# Altium PCB VESC6_3.PcbDoc
Units mm, origin at the board's own origin, x right, y up, seen from the top; angles counter-clockwise.
Board outline 80 x 50.09 mm, 2 copper layers (Top Layer, Bottom Layer); 104 components, 93 nets, 439 pads, 260 vias.
Unrouted connection lines stored in the file: 111.
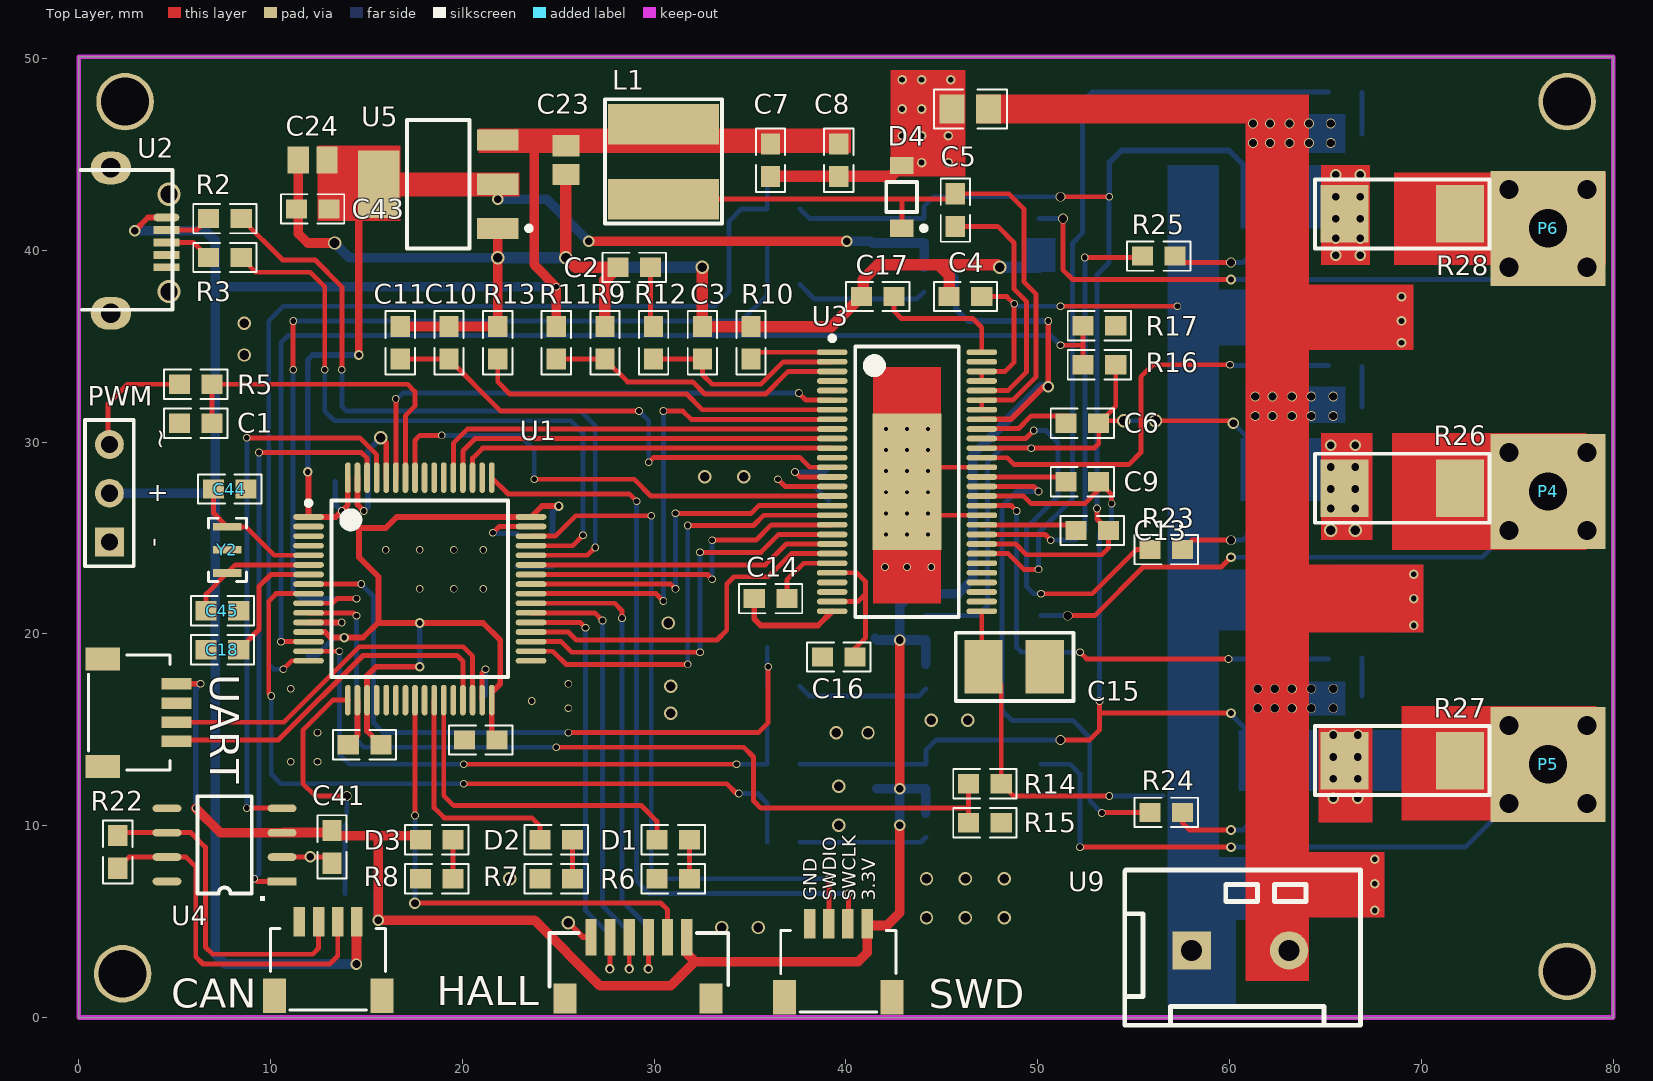
[diagram p0: Top Layer view]
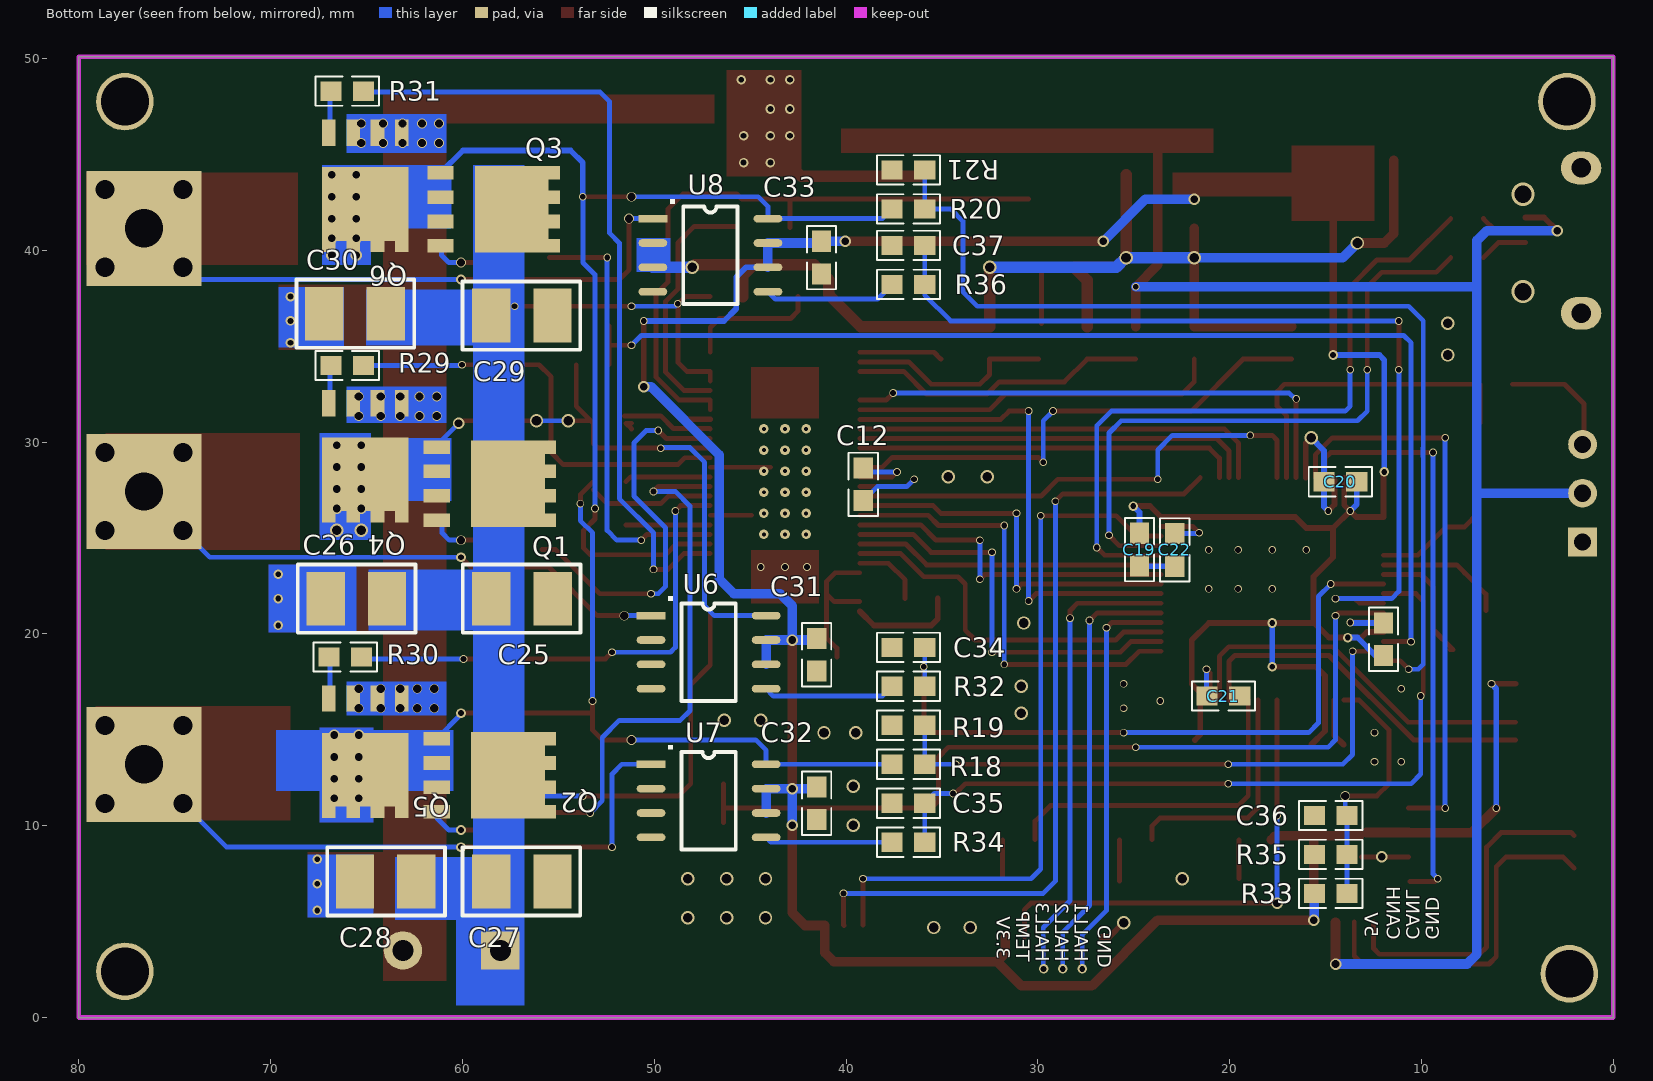
[diagram p1: Bottom Layer view, seen from below]

## Layer stack, top to bottom
Top Solder: solder mask 0.0102, Solder Resist, Dk 3.5
Top Layer: signal copper 0.0356
Dielectric1: dielectric 0.32, FR-4, Dk 4.8
Bottom Layer: signal copper 0.0356
Bottom Solder: solder mask 0.0102, Solder Resist, Dk 3.5

## Board outline
0,0 80,0 80,50.094 0,50.094 0,0

## Design rules (kind name [scope] priority, off if disabled: settings)
Clearance [All] p1: gap=0.2 ignorepadtopadclearanceinfootprint=FALSE except(0: Arc-Hole Track-Hole SMDPad-Hole THPad-Hole Via-Hole Fill-Hole Poly-Hole Region-Hole Text-Hole)
PlaneConnect [All] p1: planeconnectstyle=Direct reliefexpansion=0.508 reliefentries=4 reliefconductorwidth=0.254 reliefairgap=0.254
PolygonConnect [All] p1: connectstyle=Direct reliefconductorwidth=0.254 reliefentries=4 polygonreliefangle="90 Angle" airgapwidth=0.254
RoutingVias [All] p1: holewidth=0.711 width=1.27 viastyle="Through Hole" minholewidth=0.711 minwidth=1.27 maxholewidth=0.711 maxwidth=1.27
SilkToSolderMaskClearance SilkscreenOverComponentPads [IsPad] p1: minsilkscreentomaskgap=0.254 clearancetoexposedcopper=TRUE
SolderMaskExpansion [All] p1: expansion=0.102
Width [All] p1: maxlimit=0.8 minlimit=0.254 preferedwidth=0.3
28 further rules are at their usual default settings.

## Classes and differential pairs
component class TopLevel: C1 CAN D1 D2 D3 HALL PWM R2 R3 R5 R6 R7 R8 SWD U2 UART
component class POWER: C25 C26 C27 C28 C29 C30 C31 C32 C33 C34 C35 C36 C37 C38 C39 C40 P4 P5 P6 Q1 Q2 Q3 Q4 Q5 Q6 R23 R24 R25 R26 R27 R28 R29 R30 R31 R32 R33 R34 R35 R36 U6 U7 U8 U9
component class MCU: C18 C19 C20 C21 C22 C44 C45 U1 Y2
component class DRV8301: C2 C3 C4 C5 C6 C7 C8 C9 C10 C11 C12 C13 C14 C15 C16 C17 C23 C24 C43 D4 L1 R9 R10 R11 R12 R13 R14 R15 R16 R17 R18 R19 R20 R21 U3 U5
component class CAN: C41 R22 U4

## Components (designator, comment, footprint, x,y, rotation, side; value= is the part's Value field where it differs from the comment)
C1 "100nF" 0603-1 6.096,30.988 r0 top
C2 "6.8nF" 0603-1 28.956,39.116 r180 top
C3 "120pF" 0603-1 32.512,35.179 r90 top
C4 "4.7uF 100V" 0603-1 46.228,37.592 r180 top
C5 "100nf" 0603-1 45.7,42.1 r270 top
C6 "220nF" 0603-1 52.324,30.988 r180 top
C7 "2.2uF" 0603-1 36.068,44.704 r270 top
C8 "100uF" 0603-1 39.624,44.704 r270 top
C9 "220nF" 0603-1 52.324,27.94 r180 top
C10 "2.2uf" 0603-1 19.304,35.179 r270 top
C11 "2.2uf" 0603-1 16.764,35.179 r270 top
C12 "22nf" 0603-1 39.1,27.8 r90 bottom
C13 "220nF" 0603-1 52.832,25.4 r180 top
C14 "2.2uf" 0603-1 36.068,21.844 r0 top
C15 "4.7uF 100V" 1210 48.768,18.288 r180 top
C16 "2.2uf" 0603-1 39.624,18.796 r0 top
C17 "15nf" 0603-1 41.656,37.592 r180 top
C18 "100nf" 0603-1 7.493,19.177 r0 top
C19 "2.2u" 0603-1 24.7,24.4 r90 bottom
C20 "2.2u" 0603-1 14.224,27.94 r180 bottom
C21 "2.2u" 0603-1 20.32,16.764 r0 bottom
C22 "2.2u" 0603-1 22.86,24.384 r90 bottom
C23 "10uF" CAP805L 25.4,44.704 r90 top
C24 "10uF" CAP805L 12.192,44.704 r0 top
C25 "4.7uF 100V" 1210 56.896,21.844 r180 bottom
C26 "4.7uF 100V" 1210 65.532,21.844 r0 bottom
C27 "4.7uF 100V" 1210 56.9,7.1 r180 bottom
C28 "4.7uF 100V" 1210 64,7.1 r0 bottom
C29 "4.7uF 100V" 1210 56.9,36.6 r180 bottom
C30 "4.7uF 100V" 1210 65.6,36.7 r0 bottom
C31 "100nf" 0603-1 41.529,18.923 r270 bottom
C32 "100nf" 0603-1 41.529,11.176 r270 bottom
C33 "100nf" 0603-1 41.275,39.624 r270 bottom
C34 "4.7nF" 0603-1 36.742,19.304 r180 bottom
C35 "4.7nF" 0603-1 36.742,11.176 r180 bottom
C36 "1uF" 0603-1 14.732,10.541 r180 bottom
C37 "4.7nF" 0603-1 36.742,40.259 r180 bottom
C41 "100nf" 0603-1 13.2,8.9 r270 top
C43 "100nf" 0603-1 12.192,42.164 r0 top
C44 "100nf" 0603-1 7.874,27.559 r180 top
C45 "100nf" 0603-1 7.493,21.209 r180 top
CAN "header" "JST SH 4 Pin Side Entry" 13,0.4 r0 top (schematic designator JP1)
D1 "BLUE" 0603-1 30.988,9.271 r0 top
D2 "RED" 0603-1 24.892,9.271 r0 top
D3 "GREEN" 0603-1 18.669,9.271 r0 top
D4 "Diode 10TQ035" 0603二极管 42.9,42.789 r270 top
HALL "header" SMD-6 31.7,4.2 r180 top (schematic designator JP2)
L1 "22uH" 2.2uH电感 30.48,42.672 r90 top
P4 "PadS" MOTOR_PAD 76.6,27.432 r0 top
P5 "PadS" MOTOR_PAD 76.6,13.2 r0 top
P6 "PadS" MOTOR_PAD 76.6,41.148 r0 top
PWM "Header 3" HDR1X3 1.6,24.8 r90 top (schematic designator P2)
Q1 "CSD18540Q5B" SON5X6 55.7,30.1 r0 bottom
Q2 "CSD18540Q5B" SON5X6 55.7,14.9 r0 bottom
Q3 "CSD18540Q5B" SON5X6 55.5,44.4 r0 bottom
Q4 "CSD18540Q5B" SON5X6 62.8,26.4 r90 bottom
Q5 "CSD18540Q5B" SON5X6 62.8,11 r90 bottom
Q6 "CSD18540Q5B" SON5X6 62.8,40.5 r90 bottom
R2 "22R" 0603-1 7.62,41.656 r0 top
R3 "22R" 0603-1 7.62,39.624 r0 top
R5 "100R" 0603-1 6.096,33.02 r0 top
R6 "1K" 0603-1 30.988,7.239 r180 top
R7 "220R" 0603-1 24.892,7.239 r180 top
R8 "220R" 0603-1 18.669,7.239 r180 top
R9 "3.3K" 0603-1 27.432,35.179 r90 top
R10 "220K" 0603-1 35.052,35.179 r90 top
R11 "18K" 0603-1 24.892,35.179 r270 top
R12 "15K" 0603-1 29.972,35.179 r90 top
R13 "10K" 0603-1 21.844,35.179 r90 top
R14 "39K" 0603-1 47.244,12.192 r180 top
R15 "2.2K" 0603-1 47.244,10.16 r180 top
R16 "39K" 0603-1 53.213,34.036 r180 top
R17 "2.2K" 0603-1 53.213,36.068 r180 top
R18 "39K" 0603-1 36.742,13.208 r180 bottom
R19 "2.2K" 0603-1 36.742,15.24 r180 bottom
R20 "39K" 0603-1 36.742,42.164 r180 bottom
R21 "2.2K" 0603-1 36.742,44.196 r180 bottom
R22 "220R" 0603-1 2.032,8.636 r270 top
R23 "4.7R" 0603-1 56.7,24.4 r0 top
R24 "4.7R" 0603-1 56.7,10.7 r0 top
R25 "4.7R" 0603-1 56.3,39.7 r0 top
R26 "0.0005R" 采样电阻0.0005R 69,27.6 r180 top
R27 "0.0005R" 采样电阻0.0005R 69,13.4 r180 top
R28 "0.0005R" 采样电阻0.0005R 69,41.9 r180 top
R29 "4.7R" 0603-1 66,34 r0 bottom
R30 "4.7R" 0603-1 66.1,18.8 r0 bottom
R31 "4.7R" 0603-1 66,48.3 r0 bottom
R32 "100R" 0603-1 36.742,17.272 r0 bottom
R33 "10k" 0603-1 14.732,6.477 r0 bottom
R34 "100R" 0603-1 36.742,9.144 r0 bottom
R35 "10k" 0603-1 14.732,8.509 r180 bottom
R36 "100R" 0603-1 36.742,38.227 r0 bottom
SWD "Header 4" "JST SH 4 Pin Side Entry" 39.6,0.3 r0 top (schematic designator P3)
U1 "STM32F405RGT6" LQFP64 17.78,22.352 r0 top
U2 "USB_Mini_B" Micro_USB 4.572,39.116 r270 top
U3 "DRV8301" DRV8301 43.18,27.94 r0 top
U4 "TJA1050" SOP8-TJA1050 10.6,7.1 r180 top
U5 "AMS1117" AMS1117-SOT-223 21.844,41.148 r90 top
U6 "AD8418" SOP8-TJA1050 50.165,20.955 r180 bottom
U7 "AD8418" SOP8-TJA1050 50.165,13.208 r180 bottom
U8 "AD8418" SOP8-TJA1050 50.069,41.656 r180 bottom
U9 "Header 3" "KF 5.08-3" 63.1,3.5 r0 top
UART "Header 4" "JST SH 4 Pin Side Entry" 0.5,15.9 r270 top (schematic designator P1)
Y2 "贴片晶振 丝印80.b 3125 3脚" "CSTCE 12M" 7.747,24.384 r90 top

## Footprints (in the part's own frame and the unit in brackets; to place one, negate y for a bottom-side part, rotate by r counter-clockwise, add the part's x,y. Pads: shape width x height; smd on the part's side, far side on the other; paste and mask are expansions set on the pad)
2.2uH电感 [mm]
  rect 2.1x5.8 smd: 1(0,0) 2(3.9,0)
  silkscreen extent -1.27,-3.05 5.21,3.05
0603-1 [mm] "贴片带丝印"
  rect 1.1x1 smd: 1(-0.85,0) 2(0.85,0)
  silkscreen extent -1.65,-0.76 1.65,0.76, body extent -1.14,-0.38 1.14,0.38, height 1
0603二极管 [mm]
  rect 0.91x1.22 smd: 1(1.635,0) 2(-1.635,0)
  silkscreen extent -0.78,-0.8 1.76,1.29
1210 [mm]
  rect 2x2.8 smd: 1(-1.6,0) 2(1.6,0)
  silkscreen extent -3.09,-1.78 3.05,1.78
AMS1117-SOT-223 [mm]
  rect 1.1x2.15 smd: 1(0,0) 2(2.3,0) 3(4.6,0)
  rect 3.5x2.15 smd: 2(2.3,6.2)
  silkscreen extent -1.05,-1.75 5.65,4.72
CAP805L [mm] "Chip Capacitor, Body 2.0x1.3mm, IPC High Density"
  rect 1.1x1.4 smd: 1(-0.75,0) 2(0.75,0)
  body extent -1,-0.62 1,0.63, height 0.78
"CSTCE 12M" [mm] "晶振 3.2*1.3"
  rect 0.4x1.5 smd: 1(-1.2,0) 2(1.2,0) 3(0,0)
  silkscreen extent -1.65,-0.99 1.65,0.99, body extent -1.55,-0.89 1.55,0.89, height 0.5
DRV8301 [mm] "TSSOP, 56-Leads, Body 14.00x6.10mm, Pitch 0.50mm, Thermal Pad 7.11x3.61mm, IPC Low Density"
  oval 1.6x0.3 smd: 1(-3.9,6.75) 2(-3.9,6.25) 3(-3.9,5.75) 4(-3.9,5.25) 5(-3.9,4.75) 6(-3.9,4.25) 7(-3.9,3.75) 8(-3.9,3.25) 9(-3.9,2.75) 10(-3.9,2.25) 11(-3.9,1.75) 12(-3.9,1.25) 13(-3.9,0.75) 14(-3.9,0.25) 15(-3.9,-0.25) 16(-3.9,-0.75) 17(-3.9,-1.25) 18(-3.9,-1.75) 19(-3.9,-2.25) 20(-3.9,-2.75) 21(-3.9,-3.25) 22(-3.9,-3.75) 23(-3.9,-4.25) 24(-3.9,-4.75) 25(-3.9,-5.25) 26(-3.9,-5.75) 27(-3.9,-6.25) 28(-3.9,-6.75) 29(3.9,-6.75) 30(3.9,-6.25) 31(3.9,-5.75) 32(3.9,-5.25) 33(3.9,-4.75) 34(3.9,-4.25) 35(3.9,-3.75) 36(3.9,-3.25) 37(3.9,-2.75) 38(3.9,-2.25) 39(3.9,-1.75) 40(3.9,-1.25) 41(3.9,-0.75) 42(3.9,-0.25) 43(3.9,0.25) 44(3.9,0.75) 45(3.9,1.25) 46(3.9,1.75) 47(3.9,2.25) 48(3.9,2.75) 49(3.9,3.25) 50(3.9,3.75) 51(3.9,4.25) 52(3.9,4.75) 53(3.9,5.25) 54(3.9,5.75) 55(3.9,6.25) 56(3.9,6.75)
  rect 3.61x7.11 smd: 57(0,0)
  silkscreen extent -4.02,-7.05 2.7,7.6, body extent -4.05,-7.05 4.05,7.05, height 1.2
HDR1X3 [mm] "Connector; Header; 3 Position"
  rect 1.5x1.5 hole 0.9: 1(0,0)
  round 1.5 hole 0.9: 2(2.54,0) 3(5.08,0)
  silkscreen extent -1.27,-1.27 6.35,1.27
"JST SH 4 Pin Side Entry" [mm] "SM04B-SRSS-TB"
  rect 1.2x1.8 smd: 0(-2.8,0.75) 0(2.8,0.75)
  rect 0.6x1.55 smd: 1(-1.5,4.6) 2(-0.5,4.6) 3(0.5,4.6) 4(1.5,4.6)
  silkscreen extent -3,0 3,4.25, body extent -3,0 3,4.95, height 2.92
"KF 5.08-3" [mm]
  rect 2x2 hole 1.1: 1(-5.08,0)
  round 2 hole 1.1: 2(0,0)
  silkscreen extent -8.57,-3.9 3.72,4.2, body extent -7.45,-4 2.07,4.1, height 10.15
LQFP64 [mm] "TSQFP, 64-Leads, Body 10.00x10.00mm, Pitch 0.50mm, IPC Low Density"
  oval 1.6x0.3 smd: 1(-5.8,3.75) 2(-5.8,3.25) 3(-5.8,2.75) 4(-5.8,2.25) 5(-5.8,1.75) 6(-5.8,1.25) 7(-5.8,0.75) 8(-5.8,0.25) 9(-5.8,-0.25) 10(-5.8,-0.75) 11(-5.8,-1.25) 12(-5.8,-1.75) 13(-5.8,-2.25) 14(-5.8,-2.75) 15(-5.8,-3.25) 16(-5.8,-3.75) 33(5.8,-3.75) 34(5.8,-3.25) 35(5.8,-2.75) 36(5.8,-2.25) 37(5.8,-1.75) 38(5.8,-1.25) 39(5.8,-0.75) 40(5.8,-0.25) 41(5.8,0.25) 42(5.8,0.75) 43(5.8,1.25) 44(5.8,1.75) 45(5.8,2.25) 46(5.8,2.75) 47(5.8,3.25) 48(5.8,3.75)
  oval 0.3x1.6 smd: 17(-3.75,-5.8) 18(-3.25,-5.8) 19(-2.75,-5.8) 20(-2.25,-5.8) 21(-1.75,-5.8) 22(-1.25,-5.8) 23(-0.75,-5.8) 24(-0.25,-5.8) 25(0.25,-5.8) 26(0.75,-5.8) 27(1.25,-5.8) 28(1.75,-5.8) 29(2.25,-5.8) 30(2.75,-5.8) 31(3.25,-5.8) 32(3.75,-5.8) 49(3.75,5.8) 50(3.25,5.8) 51(2.75,5.8) 52(2.25,5.8) 53(1.75,5.8) 54(1.25,5.8) 55(0.75,5.8) 56(0.25,5.8) 57(-0.25,5.8) 58(-0.75,5.8) 59(-1.25,5.8) 60(-1.75,5.8) 61(-2.25,5.8) 62(-2.75,5.8) 63(-3.25,5.8) 64(-3.75,5.8)
  silkscreen extent -5.92,-4.6 4.6,4.6, body extent -6,-6 6,6, height 1.6
Micro_USB [mil]
  oval 16x53 smd mask+1: 1(-102.36,0)
  rect 16x53 smd mask+1: 1(0,0) 2(-76.77,0) 3(-51.18,0) 4(-25.59,0)
  oval 67x83 hole 40 mask+1: 6(-204,-114) 7(94,-114)
  silkscreen extent -200,-175 87,12
MOTOR_PAD [mil]
  round 60 hole 39.37: 1(-80,-80) 1(-80,80) 1(80,-80) 1(80,80)
  rect 236.22x236.22 hole 78.74: 1(0,0)
SMD-6 [mil]
  rect 23x75 smd mask+1: 1(0,0) 2(39.37,0) 3(78.74,0) 4(118.11,0) 5(157.48,0) 6(196.85,0)
  rect 47x62 smd mask+1: 7(250,126) 8(-50,126)
  silkscreen extent -85,-8 282,102
SON5X6 [mm]
  rect 1.372x0.71 smd: 1(5.636,0.355) 1(5.636,1.625) 1(5.636,2.895) 4(5.636,4.165)
  rect 0.59x0.71 smd: 8(-0.295,0.355) 8(-0.295,1.625) 8(-0.295,4.165) 8(-0.295,2.895)
  rect 3.85x4.52 smd: 8(1.925,2.26)
SOP8-TJA1050 [mm]
  rect 1.5x0.4 smd: 1(0,0)
  oval 1.5x0.4 smd: 2(0,-1.27) 3(0,-2.54) 4(0,-3.81) 5(6,-3.81) 6(6,-2.54) 7(6,-1.27) 8(6,0)
  silkscreen extent 0.89,-4.44 4.42,1.02
采样电阻0.0005R [mm]
  rect 2.5x3 smd: 1(-3,0) 2(3,0)
  silkscreen extent -4.55,-1.8 4.55,1.8

## Part data
C1 C2 C3 C4 C5 C6 C7 C8 C9 C10 C11 C12 C13 C14 C15 C16 C17 C18 C19 C20 C21 C22 C23 C24 C25 C26 C27 C28 C29 C30 C31 C32 C33 C34 C35 C36 C37 C41 C43 C44 C45: library part CAP, "Capacitor"
CAN: library part "HEADER 4"
D1 D2 D3: library part LED, "LED 发光二极管"
D4: "Schottky Rectifier"
HALL: library part "HEADER 6"
L1: library part L_Inductance
PWM U9: "Header, 3-Pin"
R2 R3 R5 R6 R7 R8 R9 R10 R11 R12 R13 R14 R15 R16 R17 R18 R19 R20 R21 R22 R23 R24 R25 R26 R27 R28 R29 R30 R31 R32 R33 R34 R35 R36: library part RES, "Resistor"
SWD UART: "Header, 4-Pin"
U5: "3.3V电压转换器AMS1117"
Y2: library part CRYSTAL_1, "Crystal"

## Free pads (board coordinates)
  round 3 hole 2.5: 0(2.286,2.286) 1(77.597,2.413) 2(77.597,47.752) 3(2.413,47.752)
  rect 1x1.1 smd far side: 1(11.98,20.579) 2(11.98,18.879)
  rect 1.1x1 smd: 1(14.048,14.224) 1(20.105,14.478) 2(15.748,14.224) 2(21.805,14.478)
  rect 1.3x1.5 smd: 1(45.532,47.371) 2(47.432,47.371)

## Via types
v1: diameter 0.4, hole 0.3, Top Layer to Bottom Layer, 98 vias
v2: diameter 0.6, hole 0.4, Top Layer to Bottom Layer, 39 vias
v3: diameter 0.508, hole 0.432, Top Layer to Bottom Layer, 37 vias
v4: diameter 0.5, hole 0.3, Top Layer to Bottom Layer, 33 vias
v5: diameter 0.7, hole 0.5, Top Layer to Bottom Layer, 33 vias
v6: diameter 0.5, hole 0.2, Top Layer to Bottom Layer, 18 vias
v7: diameter 1.2, hole 0.9, Top Layer to Bottom Layer, 2 vias

## Nets (pads, with @x,y where several pads share a name; then routed paths per layer and width w, separated by ;. In a path a pad name is that pad's centre, name@x,y a point inside that pad or via, vN(x,y) a via of type N, cw(c..) or ccw(c..) an arc to the next point about the centre after c; other vN are vias at no path point)
+5: C7.1 C8.1 C23.2 CAN.4 L1.2 PWM.2 R11.1 U2.1@4.572,41.716 U5.3 | length 87.1
  Top Layer w0.3: v2(2.921,41.021) 3.616,41.716 U2.1@4.572,41.716
  Top Layer w0.5: v2(14.478,2.794) CAN.4@14.478,4.978 ; 23.749,45.72 23.749,39.243 v1(24.892,38.1) R11.1
  Bottom Layer w0.5: PWM.2 7.02,27.34 ; v2(2.921,41.021) 6.604,41.021 7.112,40.513 7.112,38.1 ; 7.112,26.035 7.112,25.654 ; v2(14.478,2.794) 7.62,2.794 7.112,3.302 7.112,25.654 ; v1(24.892,38.1) 7.112,38.1 ; 7.112,25.654 7.112,38.1
AN_IN: R14.2 R15.2 U1.11 | length 45.8
  Top Layer w0.254: U1.11 14.331,21.102 v1(14.478,20.955) ; v1(24.892,14.097) 34.671,14.097 35.179,13.589 35.179,11.303 35.56,10.922 46.394,10.922 ; R15.2 46.394,10.922 ; R14.2 46.394,10.922
  Bottom Layer w0.254: v1(14.478,20.955) 14.478,14.478 14.859,14.097 v1(24.892,14.097)
C_A: R32.2 U6.5 | length 6.9
  Bottom Layer w0.254: R32.2 38.1,16.764 43.784,16.764 U6.5
C_B: R34.2 U7.5 | length 6.7
  Bottom Layer w0.254: R34.2 43.911,9.144 U7.5
C_C: R36.2 U8.5 | length 7
  Bottom Layer w0.254: R36.2 38.354,37.465 43.688,37.465 U8.5
CAN_RX: U1.61 U4.4 | length 29.6
  Top Layer w0.254: v1(8.763,10.922) U4.4@10.668,10.922 ; v1@8.836,30.299 v1(8.763,30.226) 14.641,30.226 15.53,29.337 U1.61
  Bottom Layer w0.254: v1(8.763,10.922) v1(8.763,30.226)
CAN_TX: U1.62 U4.1 | length 30.6
  Top Layer w0.254: v1(9.144,7.239) 9.283,7.1 U4.1 ; v1(9.398,29.464) 14.732,29.464 15.03,29.166 15.03,29.083 U1.62
  Bottom Layer w0.254: v1(9.144,7.239) 9.398,7.493 v1(9.398,29.464)
CANH: CAN.3 R22.2 U4.7 | length 18.7
  Top Layer w0.254: R22.2 2.628,8.382 U4.7@4.6,8.382 ; U4.7 5.6,8.37 6.096,7.874 6.096,3.175 6.477,2.794 13.081,2.794 13.5,3.213 CAN.3
CANL: CAN.2 R22.1 U4.6 | length 17.7
  Top Layer w0.254: R22.1 2.198,9.652 5.842,9.652 6.604,8.89 6.604,3.683 6.985,3.302 10.16,3.302 12.192,3.302 12.5,3.61 CAN.2
CS: U1.40 U3.8 | length 25.9
  Top Layer w0.254: U1.40 30.095,22.102 v1(30.48,21.717) ; v1(30.48,31.623) 31.496,31.623 31.929,31.19 U3.8
  Bottom Layer w0.254: v1(30.48,21.717) v1(30.48,31.623)
EN_GATE: U1.57 U3.16 | length 26
  Top Layer w0.254: U1.57 17.53,30.103 17.78,30.353 v1(18.923,30.353) ; v1(23.749,28.067) 28.956,28.067 29.833,27.19 U3.16
  Bottom Layer w0.254: v1(18.923,30.353) 22.987,30.353 23.749,29.591 v1(23.749,28.067)
FAULT: U1.59 U3.6 | length 27.1
  Top Layer w0.254: U1.59 v1(16.53,32.258) ; v1(37.543,32.561) 37.914,32.19 U3.6
  Bottom Layer w0.254: v1(16.53,32.258) 16.588,32.258 16.891,32.561 v1(37.543,32.561)
GND: C1.1 C2.2 C3.2 C4.2 C7.2 C8.2 C10.1 C11.1 C14.1 C15.1 C16.1 C17.2 C18.1 C19.1 C20.1 C21.1 C22.1 C23.1 C24.1 C25.2 C26.2 C27.2 C28.2 C29.2 C30.2 C31.2 C32.2 C33.2 C34.1 C35.1 C36.1 C37.1 C41.2 C43.1 C44.1 C45.1 CAN.0 CAN.1 D4.2 HALL.6 HALL.7 HALL.8 pad.1@11.98,20.579 pad.1@14.048,14.224 pad.1@20.105,14.478 pad.1@45.532,47.371 pad.2@47.432,47.371 PWM.1 Q4.1 Q5.1 Q6.1 R6.2 R7.2 R8.2 R9.2 R10.2 R13.2 R15.1 R17.1 R19.1 R21.1 R35.1 SWD.0 SWD.1 U1.12 U1.18 U1.60 U1.63 U2.1@4.572,39.116 U3.28 U3.30 U3.31 U3.32 U3.33 U3.34 U3.39 U3.44 U3.57 U4.2 U4.8 U5.1 U6.2 U6.3 U7.2 U7.3 U8.2 U8.3 U9.2 UART.0 UART.2 Y2.3 | length 109.1
  Top Layer w0.254: U4.2@10.668,8.382 C41.2@13.12,8.382 ; U3.57@43.93,28.69 U3.44 ; U3.57@44.93,26.19 U3.39
  Top Layer w0.3: U1.12 v1(13.716,20.602) ; pad.1@14.048,14.224 14.53,14.706 U1.18 ; U1.63 14.53,26.745 v1(14.859,26.416) ; v5(15.748,30.226) 16.03,29.944 U1.60 ; v5(25.527,4.953) 26.28,4.2 HALL.6 ; C14.1 35.218,20.789 35.56,20.447 38.537,20.447 U3.28
  Top Layer w0.5: C24.1 11.442,40.882 11.938,40.386 v5(13.335,40.386) ; C11.1 C10.1 R13.2 v5(21.844,39.624) U5.1
  Top Layer w0.6: C23.1 v5(25.4,39.624) 25.908,39.116 C2.2 27.432,38.442 R9.2 ; v5(32.512,39.116) C3.2 R10.2 39.243,36.029 C17.2 40.894,37.68 40.894,38.481 41.656,39.243 44.831,39.243 ; C7.2 C8.2 42.33,43.854 D4.2@43.18,44.704 ; C4.2 45.378,38.696 44.831,39.243 ; v5(48.006,39.116) 47.879,39.243 44.831,39.243
  Bottom Layer w0.3: pad.1@11.98,20.579 v1@13.693,20.579 ; v1(14.859,26.416) 15.074,26.631 C20.1 15.074,29.552 v5(15.748,30.226) ; C22.1 C19.1@24.684,23.534
  Bottom Layer w0.5: v5(13.335,40.386) 14.097,39.624 v5(21.844,39.624)
  Bottom Layer w0.6: v5(21.844,39.624) v5(25.4,39.624) 25.908,39.116 v5(32.512,39.116) ; v5(48.006,39.116) U8.3
  other v1: 11.049,13.335 12.446,13.335 12.446,14.859 25.527,16.129 23.622,16.51 11.049,17.145 25.527,17.399 17.78,22.352 19.558,22.352 21.082,22.352 42.037,23.495 43.18,23.495 44.45,23.495 16.002,24.384 17.78,24.384 19.558,24.384 21.082,24.384
  other v2: 12.065,8.382
  other v3: 61.468,16.129 62.357,16.129 63.246,16.129 64.262,16.129 65.405,16.129 61.468,17.145 62.357,17.145 63.246,17.145 64.262,17.145 65.405,17.145 61.341,31.369 62.23,31.369 63.246,31.369 64.262,31.369 65.405,31.369 61.341,32.385 62.23,32.385 63.246,32.385 64.262,32.385 65.405,32.385 61.214,45.593 62.103,45.593 63.119,45.593 64.135,45.593 65.278,45.593 61.214,46.609 62.103,46.609 63.119,46.609 64.135,46.609 65.278,46.609
  other v4: 67.564,5.588 67.564,6.985 67.564,8.255 69.596,20.447 69.596,21.844 69.596,23.114 68.961,35.179 68.961,36.322 68.961,37.592 43.942,44.577 45.339,44.577 42.926,45.974 43.942,45.974 45.339,45.974 42.926,47.371 43.942,47.371 42.926,48.895 43.942,48.895 45.466,48.895
  other v5: 33.528,4.699 35.433,4.699 44.196,5.207 46.228,5.207 48.26,5.207 22.479,7.239 44.196,7.239 46.228,7.239 48.26,7.239 39.624,10.033 39.624,12.065 39.497,14.859 41.148,14.859 44.45,15.494 46.355,15.494 30.861,15.875 30.861,17.272 30.734,20.574 32.639,28.194 34.671,28.194 8.636,34.544 8.636,36.195
  other v6: 42.08,25.19 43.18,25.19 44.28,25.19 42.08,26.29 43.18,26.29 44.28,26.29 42.08,27.39 43.18,27.39 44.28,27.39 42.08,28.49 43.18,28.49 44.28,28.49 42.08,29.59 43.18,29.59 44.28,29.59 42.08,30.69 43.18,30.69 44.28,30.69
HA: U1.41 U3.17 | length 19.9
  Top Layer w0.254: U1.41 30.865,22.602 v1(31.115,22.352) ; v1(31.115,26.289) 35.052,26.289 35.453,26.69 U3.17
  Bottom Layer w0.254: v1@31.111,22.352 31.111,25.523 ; 31.115,25.527 v1(31.115,26.289)
HALL1: HALL.5 U1.37 | length 23.2
  Top Layer w0.254: U1.37 26.134,20.602 v1(26.416,20.32) ; v4@27.7,2.554 HALL.5
  Bottom Layer w0.254: v1(26.416,20.32) 26.416,5.588 27.339,4.665 ; 27.559,4.445 27.339,4.665 ; v4(27.686,2.54) 27.686,4.318 27.339,4.665
HALL2: HALL.4 U1.38 | length 24.3
  Top Layer w0.254: U1.38 26.904,21.102 v1(27.305,20.701) ; HALL.4 28.7,2.542 v4(28.702,2.54)
  Bottom Layer w0.254: v1(27.305,20.701) 27.305,5.842 28.702,4.445 v4(28.702,2.54)
HALL3: HALL.3 U1.39 | length 25.8
  Top Layer w0.254: U1.39 27.94,21.602 28.321,21.221 v1(28.321,20.828) ; v4(29.7,2.54) HALL.3
  Bottom Layer w0.254: v1(28.321,20.828) 28.321,6.096 29.718,4.699 v4@29.718,2.54
HB: U1.42 U3.19 | length 18.2
  Top Layer w0.254: U1.42 32.778,23.102 v1(33.02,22.86) ; v1(33.02,24.892) 35.306,24.892 36.104,25.69 U3.19
  Bottom Layer w0.254: v1(33.02,22.86) v1(33.02,24.892)
HC: U1.43 U3.21 | length 16.2
  Top Layer w0.254: U1.43 35.794,23.602 36.882,24.69 U3.21
LA: U1.34 U3.18 | length 23.6
  Top Layer w0.254: U1.34 24.713,19.102 25.4,18.415 v1(31.75,18.415) ; v1(31.75,25.654) 35.179,25.654 35.715,26.19 U3.18
  Bottom Layer w0.254: v1(31.75,18.415) v1(31.75,25.654) v1@31.75,25.527
LB: U1.35 U3.20 | length 21.5
  Top Layer w0.254: U1.35 25.146,19.602 25.698,19.05 v1(32.385,19.05) ; v1(32.385,24.257) 35.56,24.257 36.493,25.19 U3.20
  Bottom Layer w0.254: v1(32.385,19.05) v1(32.385,24.257)
LC: U1.36 U3.22 | length 19.2
  Top Layer w0.254: U1.36 25.527,20.102 25.944,19.685 33.274,19.685 33.782,20.193 33.782,22.606 34.163,22.987 35.941,22.987 37.144,24.19 U3.22
LED1: D1.1 U1.27 | length 17.6
  Top Layer w0.254: U1.27 19.03,13.863 19.03,11.577 19.558,11.049 29.337,11.049 30.138,10.248 D1.1
LED2: D2.1 U1.26 | length 12.2
  Top Layer w0.254: U1.26 18.53,10.934 19.05,10.414 23.622,10.414 24.042,9.994 D2.1
M_TEMP: HALL.2 U1.24 | length 25.3
  Top Layer w0.254: v2(17.526,5.969) 30.353,5.969 30.7,5.622 HALL.2 ; v1(17.526,10.541) 17.526,12.446 ; 17.53,12.45 U1.24
  Bottom Layer w0.254: v2(17.526,5.969) v1(17.526,10.541)
NetC2_1: C2.1 R12.2 | length 2.9
  Top Layer w0.254: R12.2@29.806,36.195 C2.1
NetC3_1: C3.1 R12.1 U3.2 | length 10.8
  Top Layer w0.254: R12.1 C3.1 32.512,33.528 33.02,33.02 35.56,33.02 36.73,34.19 U3.2
NetC4_1: C4.1 C15.2 C25.1 C26.1 C27.1 C28.1 C29.1 C30.1 Q1.8 Q2.8 Q3.8 R14.1 U3.29 U3.53 U3.54 U9.1 | length 34
  Top Layer w0.254: C4.1 48.387,37.592 v1(48.768,37.211) 48.768,34.163 48.295,33.69 U3.54 U3.53 ; U3.29 47.08,18.376 C15.2 48.094,17.362 R14.1 48.729,11.557 v1(53.721,11.557) ; v1(51.181,37.084) v1(57.277,37.084)
  Bottom Layer w0.254: v1(48.768,37.211) 48.895,37.084 v1(51.181,37.084) ; v1(53.721,11.557) Q2.8@56.542,11.557
NetC5_1: C5.1 D4.1 L1.1 U3.50 U3.51 | length 33.6
  Top Layer w0.254: L1.1 42.926,42.672 ; D4.1@42.926,41.18 42.926,42.672 ; U3.50 U3.51 48.7,32.19 49.911,33.401 49.911,37.719 49.276,38.354 49.276,42.164 48.49,42.95 C5.1 45.422,42.672 42.926,42.672
NetC5_2: C5.2 U3.52 | length 13.1
  Top Layer w0.254: C5.2 47.904,41.25 48.768,40.386 48.768,37.973 49.403,37.338 49.403,33.655 48.438,32.69 U3.52
NetC6_1: C6.1 Q1.1 Q4.8 R16.1 R26.2 U3.46 U6.8 | length 33.7
  Top Layer w0.254: U3.46 v1(49.657,29.69) 52.931,29.69 53.174,29.933 C6.1 C6.1@53.301,31.115 ; R16.1 54.063,31.877 C6.1@53.301,31.115 ; v5(54.483,31.115) C6.1@53.301,31.115 ; v5(56.134,31.115) 60.071,31.115 v2(60.198,30.988)
  Bottom Layer w0.254: U6.8 46.863,20.955 47.371,21.463 47.371,28.956 48.133,29.718 v1@49.657,29.718 ; v5(54.483,31.115) 55.753,31.115 ; 55.333,31.115 55.753,31.115 ; v5(56.134,31.115) 55.753,31.115 ; v2(60.198,30.988) 61.214,29.972 61.214,29.21
  other v2: 65.278,26.543 66.548,26.543 65.278,27.559 66.548,27.559 65.278,28.702 66.548,28.702 65.278,29.845 66.548,29.845
  other v5: 65.278,25.4 66.548,25.4
NetC6_2: C6.2 U3.48 | length 5.5
  Top Layer w0.254: U3.48 47.103,30.713 49.001,30.713 49.657,31.369 C6.2@51.562,31.369 ; C6.2@51.176,30.69 C6.2 C6.2@51.181,30.988
NetC9_1: C9.1 Q2.1 Q5.8 R18.1 R27.2 U3.41 U7.8 | length 45.6
  Top Layer w0.254: U3.41 49.264,27.19 49.657,26.797 52.451,26.797 C9.1@53.174,27.52 ; v3(51.181,14.478) 52.705,14.478 53.213,14.986 53.213,15.875 ; C9.1 53.848,27.266 v1(53.848,26.797) ; v1(53.213,16.51) 53.213,15.875 ; v4(60.071,15.875) 53.213,15.875
  Bottom Layer w0.254: R18.1 U7.8 44.165,13.939 44.704,14.478 v3(51.181,14.478) ; v1(53.213,16.51) 53.213,25.273 53.848,25.908 v1(53.848,26.797) ; v4(60.071,15.875) 60.071,15.81 Q2.1@61.336,14.545
  other v2: 65.405,11.43 66.675,11.43 65.405,12.446 66.675,12.446 65.405,13.589 66.675,13.589 65.405,14.732 66.675,14.732
NetC9_2: C9.2 U3.43 | length 4.5
  Top Layer w0.254: U3.43 51.224,28.19 C9.2
NetC10_2: C10.2 C11.2 U3.13 | length 26.3
  Top Layer w0.254: C11.2 C10.2 22.01,31.623 v1(29.21,31.623) ; v1(29.718,28.956) 29.972,29.21 37.592,29.21 38.112,28.69 U3.13
  Bottom Layer w0.254: v1(29.21,31.623) 29.718,31.115 v1(29.718,28.956)
NetC12_1: C12.1 U3.15 | length 6.1
  Top Layer w0.254: v1(36.449,28.067) 36.826,27.69 U3.15
  Bottom Layer w0.254: v1(36.449,28.067) 36.83,27.686 38.364,27.686 C12.1
NetC12_2: C12.2 U3.14 | length 3.9
  Top Layer w0.254: v1(37.338,28.448) 37.596,28.19 37.719,28.19 U3.14
  Bottom Layer w0.254: v1(37.338,28.448) 38.898,28.448 C12.2
NetC13_1: C13.1 Q3.1 Q6.8 R20.1 R28.2 U3.36 U8.8 | length 53.3
  Top Layer w0.254: U3.36 48.843,24.69 49.403,24.13 53.34,24.13 53.682,24.472 C13.1 C13.1@53.575,25.507 ; v3(51.181,42.799) v1(53.721,42.799) ; v1(53.086,26.543) 53.086,25.996 C13.1@53.575,25.507 ; C13.1@53.34,25.742 C13.1@53.575,25.507
  Bottom Layer w0.254: R20.1 38.1,41.656 U8.8 44.069,42.291 44.577,42.799 v3(51.181,42.799) ; v1(53.086,26.543) 53.086,38.735 53.721,39.37 v1(53.721,42.799)
  Bottom Layer w0.3: v1(53.721,42.799) 53.721,44.577 54.356,45.212 59.969,45.212 Q3.1@61.136,44.045
  other v2: 65.532,39.751 66.802,39.751 65.532,40.64 66.802,40.64 65.532,41.656 66.802,41.656 65.532,42.799 66.802,42.799 65.532,43.942 66.802,43.942
NetC13_2: C13.2 U3.38 | length 4.4
  Top Layer w0.254: U3.38 C13.2@51.474,25.69
NetC14_2: C14.2 U3.23 | length 3.7
  Top Layer w0.254: C14.2 36.918,22.821 37.787,23.69 U3.23
NetC16_2: C16.2 U3.24 U3.27 | length 8
  Top Layer w0.254: U3.27 40.613,21.69 41.021,22.098 ; U3.24 40.564,23.19 41.021,22.733 41.021,22.098 ; C16.2 40.474,19.265 41.021,19.812 41.021,22.098
NetC17_1: C17.1 U3.56 | length 7
  Top Layer w0.254: C17.1 42.506,36.83 42.887,36.449 46.609,36.449 47.08,35.978 U3.56
NetC21_2: C21.2 U1.31 | length 3
  Top Layer w0.254: U1.31 21.03,17.982 v1(21.209,18.161)
  Bottom Layer w0.254: C21.2@21.209,16.803 v1(21.209,18.161)
NetC22_2: C22.2 U1.47 | length 3.4
  Top Layer w0.254: v1(21.59,25.273) 21.919,25.602 U1.47
  Bottom Layer w0.254: v1(21.59,25.273) 21.629,25.234 C22.2
NetC34_2: C34.2 R32.1 U1.8 | length 36.2
  Top Layer w0.254: U1.8 v1(14.728,22.602) v1@14.732,22.606 ; v1(25.527,14.859) 35.433,14.859 35.941,15.367 v1(35.941,18.288)
  Bottom Layer w0.254: v1(14.728,22.602) 15.367,21.963 15.367,15.367 15.875,14.859 v1(25.527,14.859) ; R32.1 C34.2
NetC35_2: C35.2 R34.1 U1.9 | length 39.7
  Top Layer w0.254: v1(10.033,16.764) 9.906,16.891 9.906,21.717 10.291,22.102 U1.9 ; v1(20.066,12.192) 33.782,12.192 v1@34.29,11.684
  Bottom Layer w0.254: v1(10.033,16.764) 10.033,12.7 10.541,12.192 v1(20.066,12.192) ; v1(34.417,11.684) 35.384,11.684 C35.2 R34.1
NetC37_2: C37.2 R36.1 U1.10 | length 48
  Top Layer w0.254: v1(11.176,33.782) v1(11.176,36.322) ; U1.10 13.22,21.602 13.462,21.844 v1(14.478,21.844)
  Bottom Layer w0.254: v1(11.176,33.782) 11.176,22.225 11.557,21.844 v1(14.478,21.844) ; v1(11.176,36.322) 34.544,36.322 35.892,37.67 R36.1 C37.2
NetC44_2: C44.2 U1.5 Y2.2 | length 7.1
  Top Layer w0.254: C44.2 7.024,26.307 Y2.2 8.706,25.584 10.188,24.102 U1.5
NetC45_2: C45.2 U1.6 Y2.1 | length 6.8
  Top Layer w0.254: C45.2 6.643,22.08 Y2.1 8.165,23.602 U1.6
NetD1_2: D1.2 R6.1 | length 2
  Top Layer w0.254: R6.1 D1.2
NetD2_2: D2.2 R7.1 | length 2.2
  Top Layer w0.254: R7.1@25.742,7.112 D2.2
NetD3_2: D3.2 R8.1 | length 2
  Top Layer w0.254: R8.1 D3.2
NetP2_3: PWM.3 R5.1 | length 6.2
  Top Layer w0.254: PWM.3@1.524,29.956 1.524,32.004 2.54,33.02 R5.1
NetP4_1: P4.1 R26.1 U6.1 | length 26.2
  Top Layer w0.254: v3(51.562,20.955) 52.959,20.955 55.499,23.495 59.563,23.495 v4(60.071,24.003)
  Bottom Layer w0.254: U6.1 v3(51.562,20.955) ; v4(60.071,24.003) 73.171,24.003 P4.1@74.568,25.4
NetP5_1: P5.1 R27.1 U7.1 | length 29.4
  Top Layer w0.254: v1(52.197,8.89) v4(60.071,8.89)
  Bottom Layer w0.254: U7.1 51.689,13.208 52.197,12.7 v1(52.197,8.89) ; v4(60.071,8.89) 72.29,8.89 P5.1@74.568,11.168
NetP6_1: P6.1 R28.1 U8.1 | length 27.6
  Top Layer w0.254: v3(51.308,41.656) 51.308,38.989 51.816,38.481 v4(60.071,38.481)
  Bottom Layer w0.254: U8.1 v3(51.308,41.656) ; v4(60.071,38.481) 73.933,38.481 P6.1@74.568,39.116
NetQ1_4: Q1.4 R23.2 | length 4.6
  Top Layer w0.254: R23.2 58.042,24.892 v3(60.071,24.892)
  Bottom Layer w0.254: v3(60.071,24.892) 60.682,24.892 61.063,25.273 Q1.4@61.063,26.035
NetQ2_4: Q2.4 R24.2 | length 5.1
  Top Layer w0.254: R24.2 57.55,10.141 57.912,9.779 v4(60.071,9.779)
  Bottom Layer w0.254: v4(60.071,9.779) 60.706,9.779 61.336,10.409 Q2.4
NetQ3_4: Q3.4 R25.2 | length 4.9
  Top Layer w0.254: R25.2 57.48,39.37 v3(60.071,39.37)
  Bottom Layer w0.254: v3(60.071,39.37) 60.706,39.37 61.087,39.751 61.087,40.37 Q3.4@61.063,40.395
NetQ4_4: Q4.4 R29.2 | length 2.1
  Bottom Layer w0.254: Q4.4@66.905,31.819 R29.2@66.905,33.945
NetQ5_4: Q5.4 R30.2 | length 2
  Bottom Layer w0.254: Q5.4@66.905,16.763 R30.2@66.905,18.755
NetQ6_4: Q6.4 R31.2 | length 2.2
  Bottom Layer w0.254: Q6.4@66.905,46.063 R31.2@66.905,48.245
NetR2_1: R2.1 U2.2 | length 2.4
  Top Layer w0.254: U2.2 6.18,41.066 R2.1
NetR3_1: R3.1 U2.3 | length 2.5
  Top Layer w0.254: U2.3 5.978,40.416 R3.1
NetR9_1: R9.1 R11.2 U3.3 | length 15.6
  Top Layer w0.254: R11.2 R9.1 28.614,33.147 32.004,33.147 32.639,32.512 35.814,32.512 36.992,33.69 U3.3
NetR10_1: R10.1 U3.1 | length 4.4
  Top Layer w0.254: R10.1 35.413,34.69 U3.1
NetR13_1: R13.1 U3.7 | length 19.2
  Top Layer w0.254: R13.1 21.844,33.147 22.479,32.512 31.69,32.512 32.512,31.69 U3.7
NetR23_1: R23.1 U3.47 | length 20.1
  Top Layer w0.254: U3.47 49.367,30.19 v1(49.784,30.607) ; v1(50.165,22.098) 52.832,22.098 55.134,24.4 R23.1
  Bottom Layer w0.254: v1(49.784,30.607) 50.419,30.607 51.054,29.972 51.054,27.178 49.403,25.527 49.403,22.479 49.784,22.098 v1(50.165,22.098)
NetR24_1: R24.1 U3.42 | length 27.8
  Top Layer w0.254: U3.42 49.78,27.69 v1(50.038,27.432) ; v1@53.372,10.7 R24.1
  Bottom Layer w0.254: v1(50.038,27.432) 48.895,27.432 48.133,26.67 48.133,16.002 48.641,15.494 51.816,15.494 52.705,14.605 52.705,11.303 v1(53.34,10.668)
NetR25_1: R25.1 U3.37 | length 22.9
  Top Layer w0.254: U3.37 50.375,25.19 v1(50.673,24.892) ; v1(52.451,39.624) R25.1@55.45,39.624
  Bottom Layer w0.254: v1(50.673,24.892) 51.943,24.892 52.451,25.4 v1(52.451,39.624)
NetR29_1: R29.1 U3.45 | length 22.6
  Top Layer w0.254: U3.45 48.407,29.19 48.768,28.829 54.737,28.829 55.372,29.464 55.372,33.401 56.007,34.036 v1(60.017,34.036)
  Bottom Layer w0.254: v1@60.071,34.036 60.107,34 R29.1
NetR30_1: R30.1 U3.40 | length 25.5
  Top Layer w0.254: U3.40 48.621,26.69 v1(48.895,26.416) ; v1(52.197,19.05) 52.547,18.7 v1(59.944,18.7)
  Bottom Layer w0.254: v1(48.895,26.416) 48.895,19.304 49.149,19.05 v1(52.197,19.05) ; v1(59.944,18.7) R30.1@65.15,18.7
NetR31_1: R31.1 U3.35 | length 41.7
  Top Layer w0.254: U3.35 48.454,24.19 49.276,23.368 v1(50.038,23.368)
  Bottom Layer w0.254: v1(50.038,23.368) 50.038,25.273 51.816,27.051 51.816,40.386 52.324,40.894 52.324,47.752 52.832,48.26 R31.1@65.15,48.26
NRST: C18.2 U1.7 | length 6.7
  Top Layer w0.254: C18.2@8.509,19.177 C18.2 9.398,20.232 9.398,22.479 10.021,23.102 U1.7
PB3: U1.55
PB4: U1.56
PB12: U1.33
PD2: U1.54
RX: U1.30 UART.3 | length 19.6
  Top Layer w0.254: UART.3 10.694,15.4 14.629,19.335 20.035,19.335 20.53,18.84 U1.30
SCK: U1.51 U3.11 | length 20
  Top Layer w0.254: U1.51 20.53,29.166 21.054,29.69 U3.11
SDI: U1.53 U3.9 | length 21.9
  Top Layer w0.254: U1.53 19.53,29.944 20.276,30.69 U3.9
SDO: U1.52 U3.10 | length 20.9
  Top Layer w0.254: U1.52 20.03,29.555 20.665,30.19 U3.10
SERVO: C1.2 R5.2 U1.58 | length 17.5
  Top Layer w0.254: C1.2 R5.2 17.145,33.02 17.526,32.639 17.526,31.877 17.03,31.381 U1.58
SWCLK: SWD.3 U1.49 | length 40.9
  Top Layer w0.254: U1.49 22.377,27.305 28.702,27.305 v1(29.083,26.924) ; SWD.3@40.1,4.8 40.132,4.832 v1(40.132,6.477)
  Bottom Layer w0.254: v1(29.083,26.924) 29.083,7.112 29.718,6.477 v1(40.132,6.477)
SWDIO_A: SWD.2 U1.46 | length 37
  Top Layer w0.254: U1.46 24.848,25.102 25.908,26.162 v1(29.845,26.162) ; SWD.2@39.116,4.816 v1(39.116,7.239)
  Bottom Layer w0.254: v1(29.845,26.162) 29.845,7.747 30.353,7.239 v1(39.116,7.239)
TEMP: C36.2 R33.1 R35.2 U1.17 | length 13.3
  Top Layer w0.254: v3(13.97,11.557) 12.319,11.557 11.684,12.192 11.684,14.986 13.25,16.552 U1.17
  Bottom Layer w0.254: R33.1 R35.2 ; 13.882,8.001 R35.2 ; 13.882,10.033 R35.2 ; C36.2@13.97,10.629 v3(13.97,11.557)
TX: U1.29 UART.4 | length 18.9
  Top Layer w0.254: UART.4@5.1,14.478 10.414,14.478 14.817,18.881 19.727,18.881 20.03,18.578 U1.29
USB_DM: R2.2 U1.44 | length 36.4
  Top Layer w0.254: R2.2 10.629,39.497 12.319,39.497 13.716,38.1 v1(13.716,33.782) ; U1.44 26.515,24.102 v1(26.924,24.511)
  Bottom Layer w0.254: v1(13.716,33.782) 13.716,31.877 13.97,31.623 26.162,31.623 26.924,30.861 v1(26.924,24.511)
USB_DP: R3.2 U1.45 | length 33.7
  Top Layer w0.254: R3.2 9.232,38.862 12.065,38.862 12.827,38.1 v1(12.827,33.782) ; U1.45 25.745,24.602 v1(26.289,25.146)
  Bottom Layer w0.254: v1(12.827,33.782) 12.827,31.623 13.335,31.115 25.654,31.115 26.289,30.48 v1(26.289,25.146)
VCC: C19.2 C20.2 C24.2 C31.1 C32.1 C33.1 C41.1 C43.2 D3.1 HALL.1 pad.2@11.98,18.879 pad.2@15.748,14.224 pad.2@21.805,14.478 R33.2 SWD.4 U1.1 U1.13 U1.19 U1.32 U1.48 U1.64 U3.49 U4.3 U5.2 U6.6 U6.7 U7.6 U7.7 U8.6 U8.7 UART.1 | length 210.3
  Top Layer w0.3: UART.1 v1(6.349,17.4) v1(6.349,17.4) ; v4(11.938,28.448) 11.98,28.406 U1.1 13.402,26.102 v1(13.716,26.416) ; U1.13 12.837,20.102 13.127,19.812 v4(13.843,19.812) 14.823,19.812 15.585,20.574 v4(17.78,20.574) 21.082,20.574 21.971,19.685 21.971,17.399 21.53,16.958 U1.32 21.53,14.753 pad.2@21.805,14.478 ; U1.64 14.03,26.73 v1(13.716,26.416) ; 15.621,20.701 15.621,22.987 14.605,24.003 14.605,25.527 ; pad.2@15.748,14.224 15.03,14.942 U1.19 15.03,17.824 15.494,18.288 v4(17.78,18.288) ; v4(25.019,26.67) 24.148,26.67 U1.48 16.577,26.102 16.002,25.527 14.605,25.527 ; U3.49 48.589,31.19 50.292,32.893 v2(50.546,32.893) v1(50.546,36.322) ; v1(13.716,26.416) 14.605,25.527
  Top Layer w0.4: v4(14.605,34.544) U5.2@14.605,42.409
  Top Layer w0.5: v1(6.096,10.922) 7.378,9.64 U4.3 ; U4.3@10.668,9.652 C41.1@12.866,9.652 ; C41.1@13.208,9.486 15.621,9.486 ; D3.1 17.604,9.486 15.621,9.486 ; v2(21.844,42.672) U5.2@21.844,43.448 ; v2(26.582,40.474) v2(40.044,40.474) ; HALL.1 31.7,3.352 32.131,2.921 ; v2(42.799,10.033) 42.799,5.461 42.138,4.8 41.1,4.8 41.1,3.381 40.64,2.921 32.131,2.921 ; v2(42.799,11.938) v2(42.799,19.685) ; 15.621,9.486 v2(15.621,5.08) 23.749,5.08 27.178,1.651 30.861,1.651 32.131,2.921
  Bottom Layer w0.3: v1(6.096,10.922) 6.096,17.147 v1(6.349,17.4) ; v4(11.938,28.448) 11.938,34.29 12.192,34.544 v4(14.605,34.544) ; pad.2@11.98,18.879 12.402,18.879 13.335,19.812 v4(13.843,19.812) ; C20.2 13.374,26.758 v1(13.716,26.416) ; v4(17.78,18.288) v4(17.78,20.574) ; C19.2 24.7,26.351 v4(25.019,26.67) ; U8.6 45.212,39.116 45.72,38.608 45.72,36.957 46.355,36.322 v1(50.546,36.322)
  Bottom Layer w0.5: v2@15.582,5.119 R33.2 ; v2(21.844,42.672) 24.384,42.672 v2(26.582,40.474) ; v2(40.044,40.474) C33.1 41.363,40.386 U8.7 U8.6 ; C31.1 41.617,19.685 v2(42.799,19.685) ; C32.1@41.617,11.938 v2(42.799,11.938) ; v2(42.799,10.033) v2(42.799,11.938) ; U7.6 U7.7 v2(42.799,11.938) ; U6.6 U6.7 v2(42.799,19.685) ; v2(50.546,32.893) 50.165,32.893 46.609,29.337 46.609,22.86 45.847,22.098 43.434,22.098 42.799,21.463 v2(42.799,19.685)
VOL1: R16.2 R17.2 U1.14 | length 61.3
  Top Layer w0.254: v1(10.541,19.602) U1.14 ; v1(51.181,35.052) 52.363,35.052 ; R16.2 52.363,35.052 ; R17.2 52.363,35.052
  Bottom Layer w0.254: v1@10.541,19.558 v1(10.541,19.602) 10.541,35.179 10.922,35.56 50.673,35.56 v1(51.181,35.052)
VOL2: R18.2 R19.2 U1.15 | length 31.5
  Top Layer w0.254: U1.15 v1(13.589,19.102) ; v1(20.066,13.208) v1(34.29,13.208)
  Bottom Layer w0.254: v1(13.589,19.102) 13.589,14.732 13.589,13.716 14.097,13.208 v1(20.066,13.208) ; v1(34.29,13.208) R18.2 R19.2
VOL3: R20.2 R21.2 U1.16 | length 52.9
  Top Layer w0.254: v1(10.668,18.161) 11.109,18.602 U1.16
  Bottom Layer w0.254: v1(10.668,18.161) 10.16,18.161 9.906,18.415 9.906,29.227 9.925,29.246 9.925,29.701 9.906,29.72 9.906,36.322 10.668,37.084 33.147,37.084 33.909,37.846 33.909,41.529 34.544,42.164 R20.2 R21.2
pads on no net: U1.2 U1.3 U1.4 U1.20 U1.21 U1.22 U1.23 U1.25 U1.28 U1.50 U2.4 U2.6 U2.7 U3.4 U3.5 U3.12 U3.25 U3.26 U3.55 U4.5 U6.4 U7.4 U8.4
copper on no net:
  other v7: 4.699,37.846 4.699,42.926

## Keep-outs
Keep-Out Layer:
  lines w0.254: 25,50.094 0,50.094 ; 0,50.094 0,0 80,0 80,50.094 0,50.094

## Other copper
Top Layer:
  rectangle net GND: 42.33,43.854 46.228,49.403
  rectangle net NetC13_1: 64.77,39.243 67.31,44.45
  rectangle net NetC9_1: 64.643,10.16 67.437,15.113
  rectangle net NetC6_1: 64.77,24.892 67.437,30.48
  rectangle net GND: 60.833,1.905 64.135,46.99
  rectangle net GND: 41.402,31.242 44.958,33.909
  rectangle net GND: 41.402,21.59 44.958,24.384
  rectangle net +5: 20.828,45.085 40.259,46.355
  rectangle net VCC: 12.446,41.529 16.764,45.466
  rectangle net VCC: 13.081,42.799 22.987,44.069
  rectangle net NetP6_1: 68.58,39.243 79.629,44.069
  rectangle net NetP4_1: 68.453,24.384 78.613,30.48
  rectangle net NetP5_1: 68.961,10.287 79.121,16.256
  rectangle net GND: 62.23,5.207 68.072,8.636
  rectangle net GND: 62.992,20.066 70.104,23.622
  rectangle net GND: 63.754,34.798 69.596,38.227
  rectangle net GND: 46.863,46.609 64.135,48.133
Bottom Layer:
  rectangle net GND: 68.326,20.066 70.104,23.622
  rectangle net NetC13_1: 64.77,39.243 67.31,40.513
  rectangle net NetC9_1: 64.643,10.16 67.437,15.113
  rectangle net NetC6_1: 64.77,24.892 67.437,30.48
  rectangle net NetC6_1: 60.579,26.924 64.008,30.226
  rectangle net NetC4_1: 56.769,5.461 59.436,44.45
  rectangle net NetC4_1: 57.023,20.193 64.897,23.368
  rectangle net NetC4_1: 57.023,5.08 63.5,8.382
  rectangle net NetC4_1: 57.277,35.052 65.024,37.973
  rectangle net NetC9_1: 60.452,11.811 69.723,14.986
  rectangle net NetC6_1: 62.357,26.924 67.056,30.226
  rectangle net NetC13_1: 60.579,41.148 67.31,44.45
  rectangle net GND: 60.833,30.988 66.04,32.893
  rectangle net GND: 60.833,45.085 66.04,47.117
  rectangle net GND: 60.833,15.748 66.04,17.526
  rectangle net NetC4_1: 56.769,0.635 60.325,6.35
  rectangle net GND: 65.532,20.115 68.58,23.622
  rectangle net GND: 49.149,38.862 50.927,40.64
  rectangle net GND: 66.167,34.925 69.596,38.1
  rectangle net GND: 64.643,5.207 68.072,8.509

## Silkscreen, mask and mechanical layers (free items; w line width, h text height)
Top Overlay:
  lines w0.1: 14.644,13.462 13.247,13.462 13.247,14.986 14.644,14.986 ; 15.152,13.462 16.549,13.462 16.549,14.986 15.152,14.986 ; 20.701,13.716 19.304,13.716 19.304,15.24 20.701,15.24 ; 21.209,13.716 22.606,13.716 22.606,15.24 21.209,15.24 ; 46.101,46.355 44.577,46.355 44.577,48.387 46.101,48.387 ; 46.863,46.355 48.387,46.355 48.387,48.387 46.863,48.387
  text "~" at 4.699,29.591 h1 r90
  text "+" at 3.556,26.924 h1
  text "-" at 4.318,24.511 h1 r90
  text "GND" at 38.481,6.096 h0.7 r90
  text "SWDIO" at 39.497,6.096 h0.7 r90
  text "SWCLK" at 40.513,6.096 h0.7 r90
  text "3.3V" at 41.529,6.096 h0.7 r90
Bottom Overlay:
  lines w0.1: 11.218,19.475 11.218,18.078 12.742,18.078 12.742,19.475 ; 11.218,19.983 11.218,21.38 12.742,21.38 12.742,19.983
  text "GND" at 26.162,4.826 h0.7 r270
  text "5V" at 12.954,4.191 h0.7 r90
  text "GND" at 9.779,4.064 h0.7 r90
  text "CANL" at 10.795,4.064 h0.7 r90
  text "CANH" at 11.811,4.064 h0.7 r90
  text "3.3V" at 32.131,3.048 h0.7 r90
  text "HALL1" at 28.067,2.921 h0.7 r90
  text "HALL2" at 29.083,2.921 h0.7 r90
  text "HALL3" at 30.099,2.921 h0.7 r90
  text "TEMP" at 31.115,2.921 h0.7 r90
Top Solder:
  rectangle: 41.529,31.496 44.831,33.782
  rectangle: 41.402,21.59 44.958,24.384

## Dimensions
0,0 to 0,50.094 on Top Overlay
0,50.094 to 80,50.094 on Top Overlay